# Altium PCB Solar_Phone_Charger.PcbDoc
Units mm, origin at the board's own origin, x right, y up, seen from the top; angles counter-clockwise.
Board outline 86 x 86 mm, 2 copper layers (Top Layer, Bottom Layer); 28 components, 11 nets, 64 pads, 3 vias.
Unrouted connection lines stored in the file: 1.
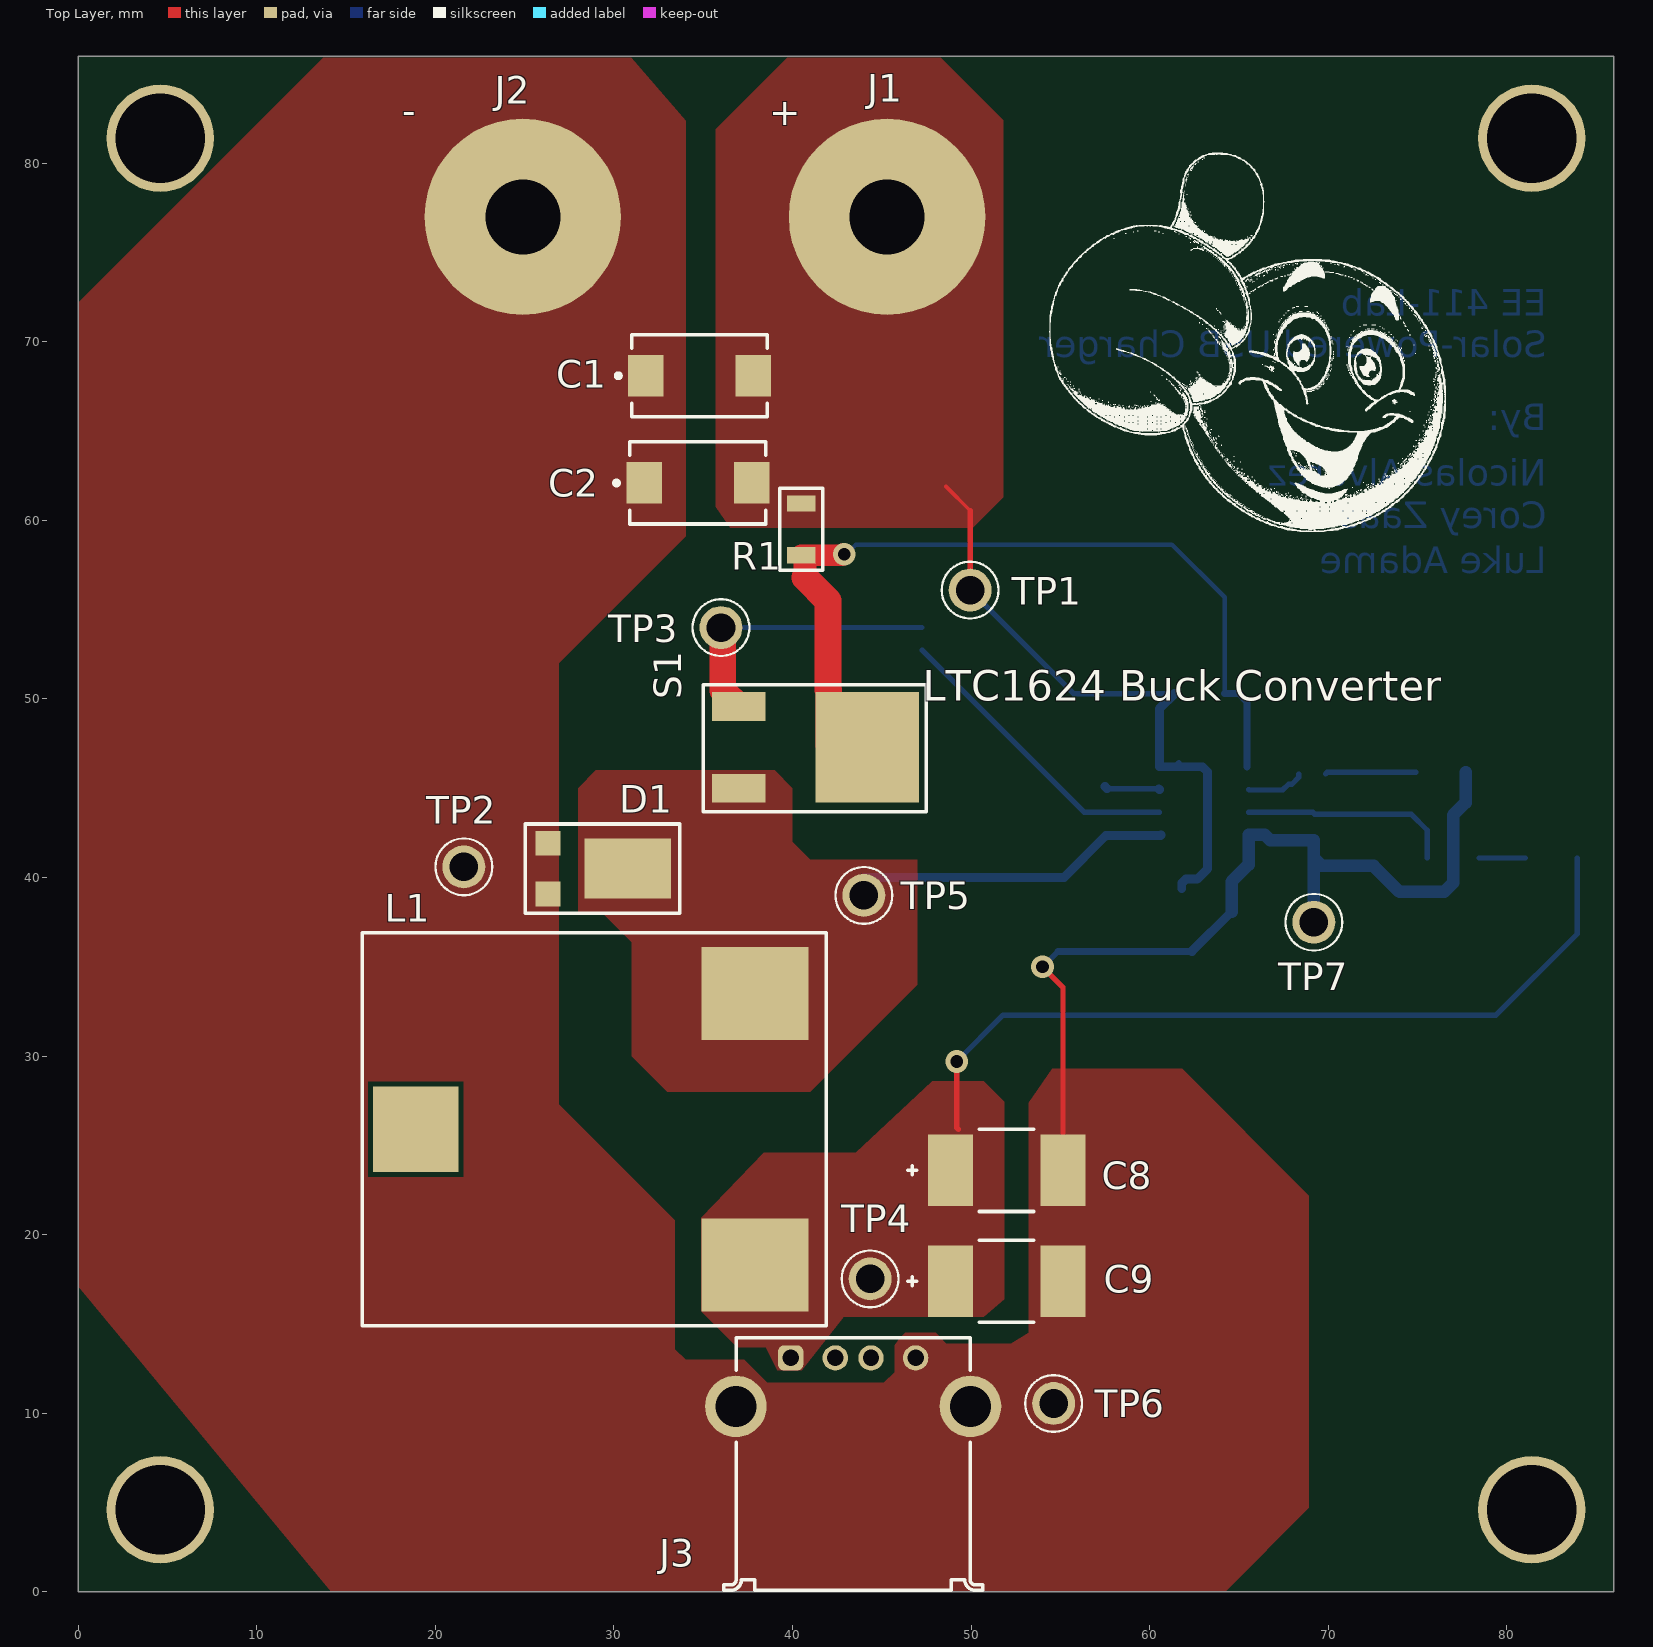
[diagram p0: Top Layer view]
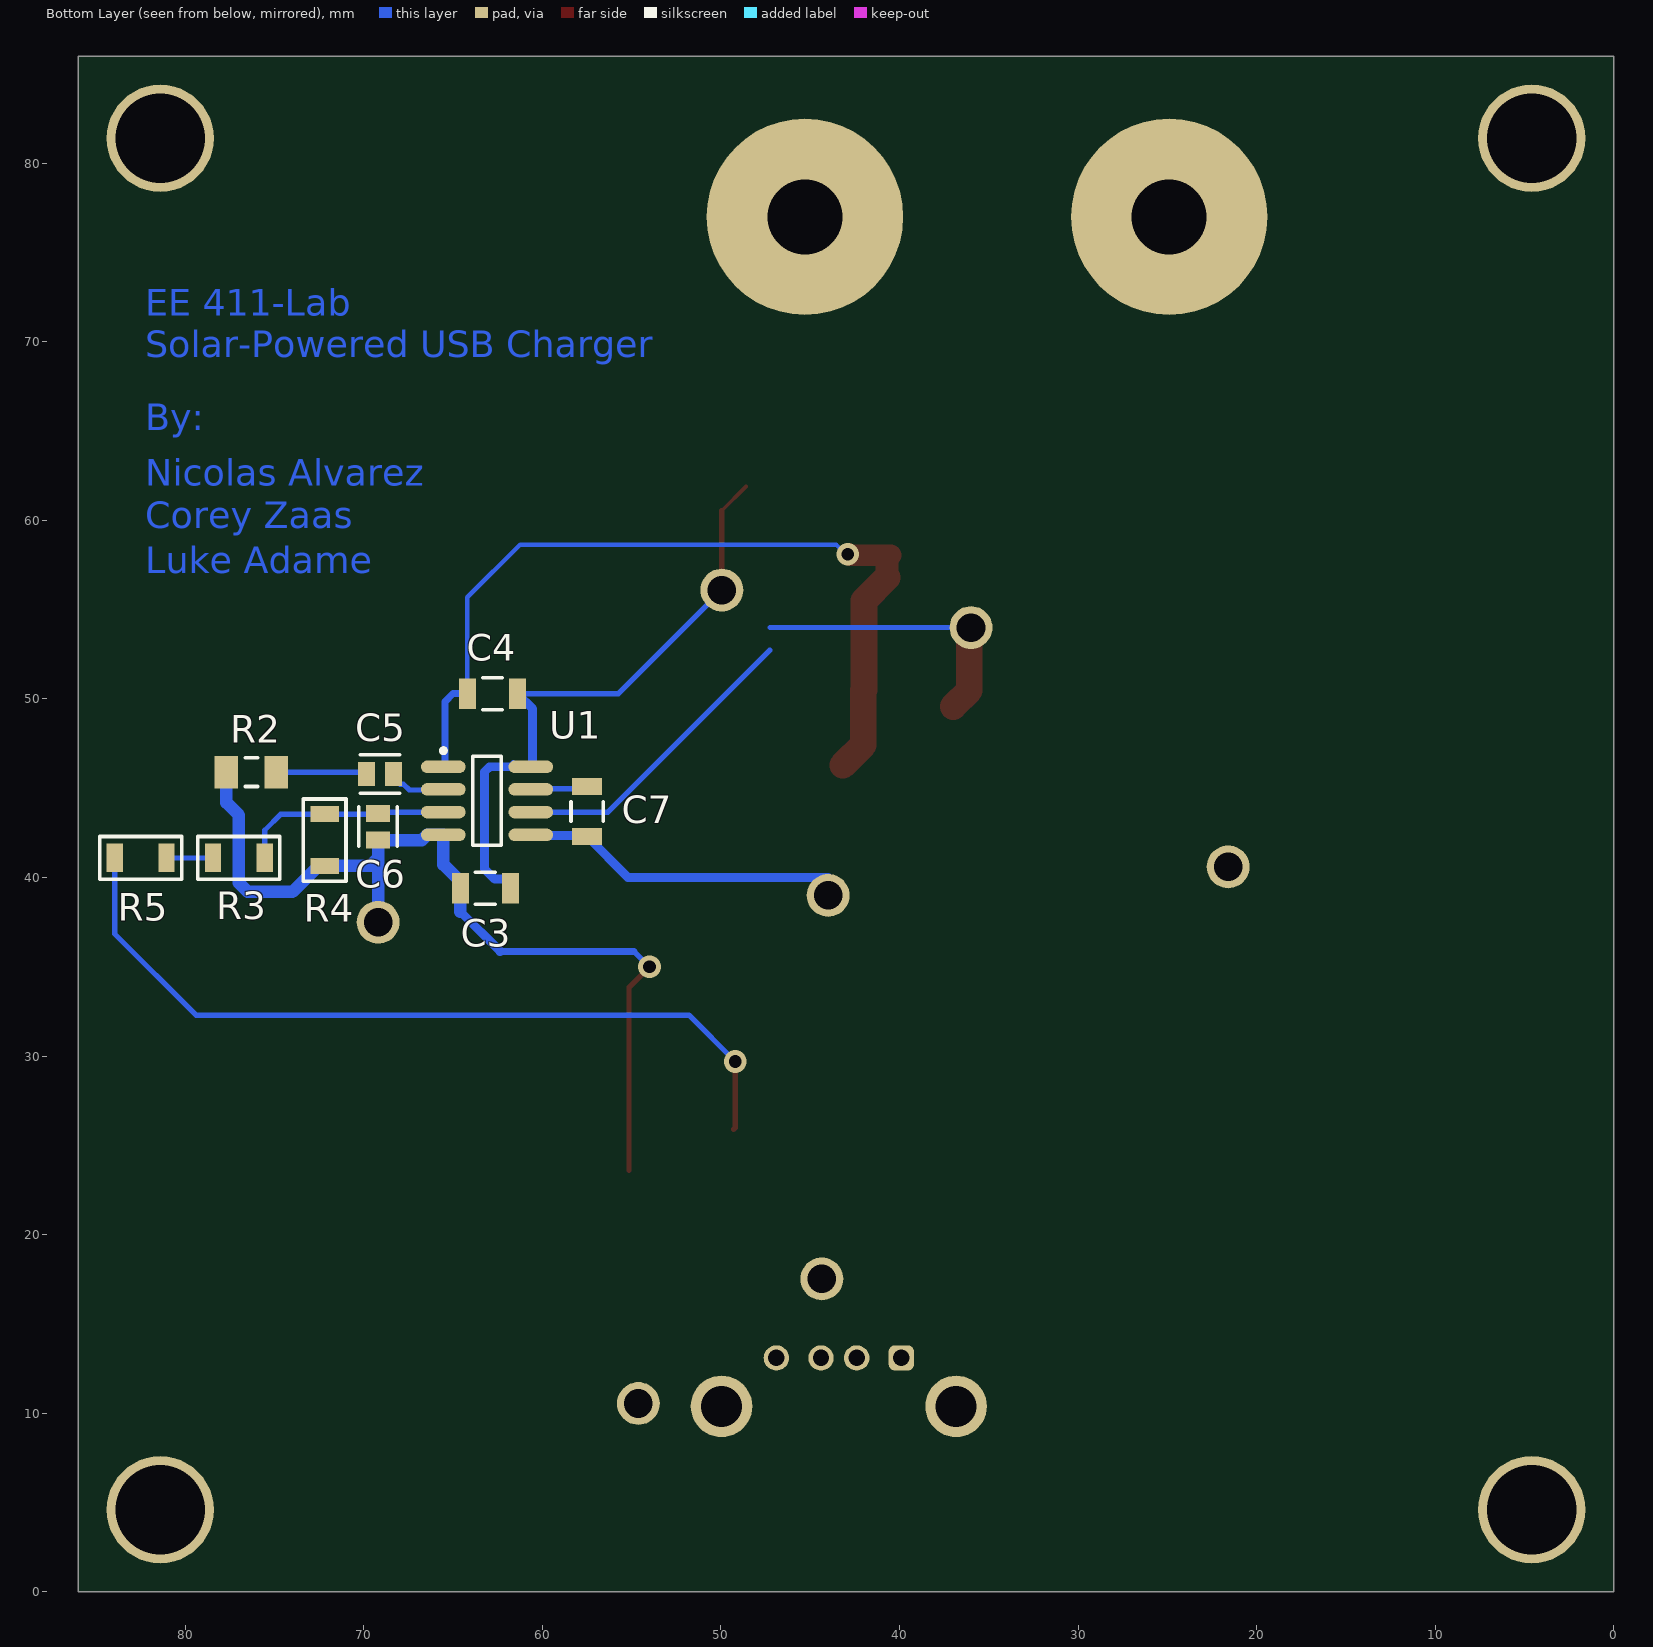
[diagram p1: Bottom Layer view, seen from below]
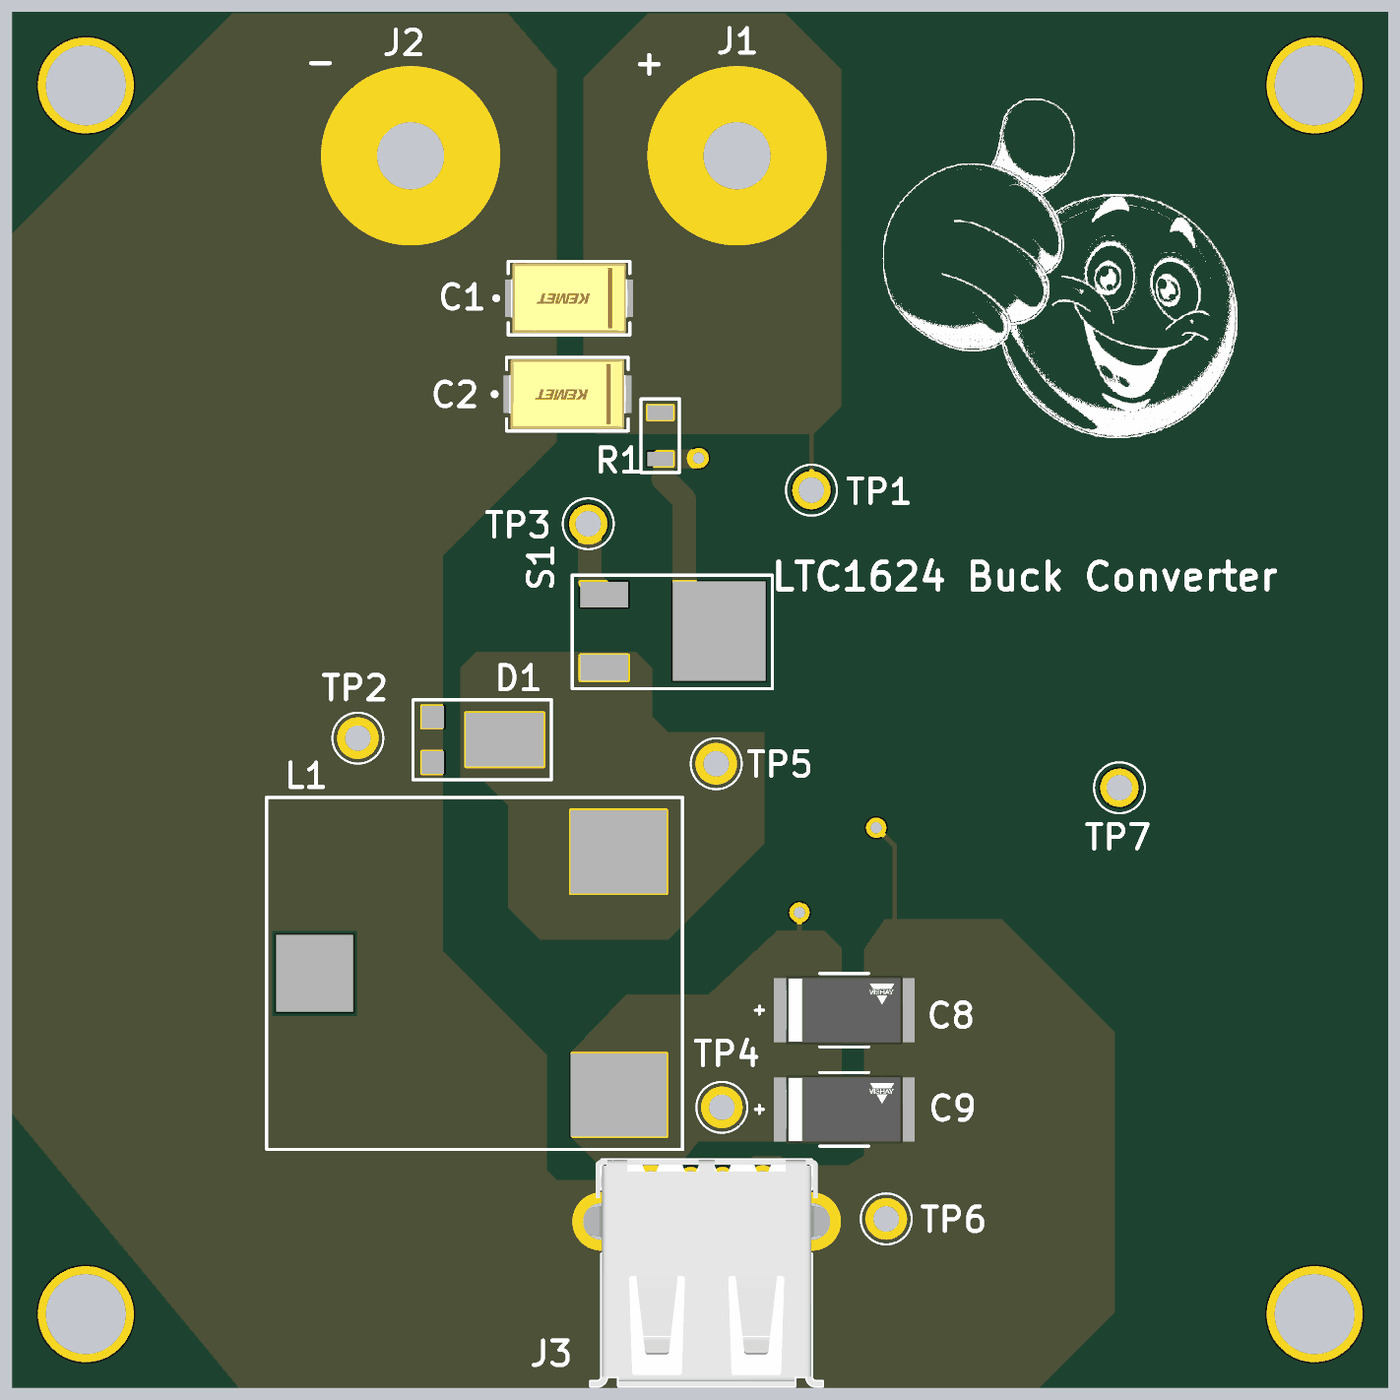
[diagram p2: 3D render of the assembled board from above, using the file's embedded part models]
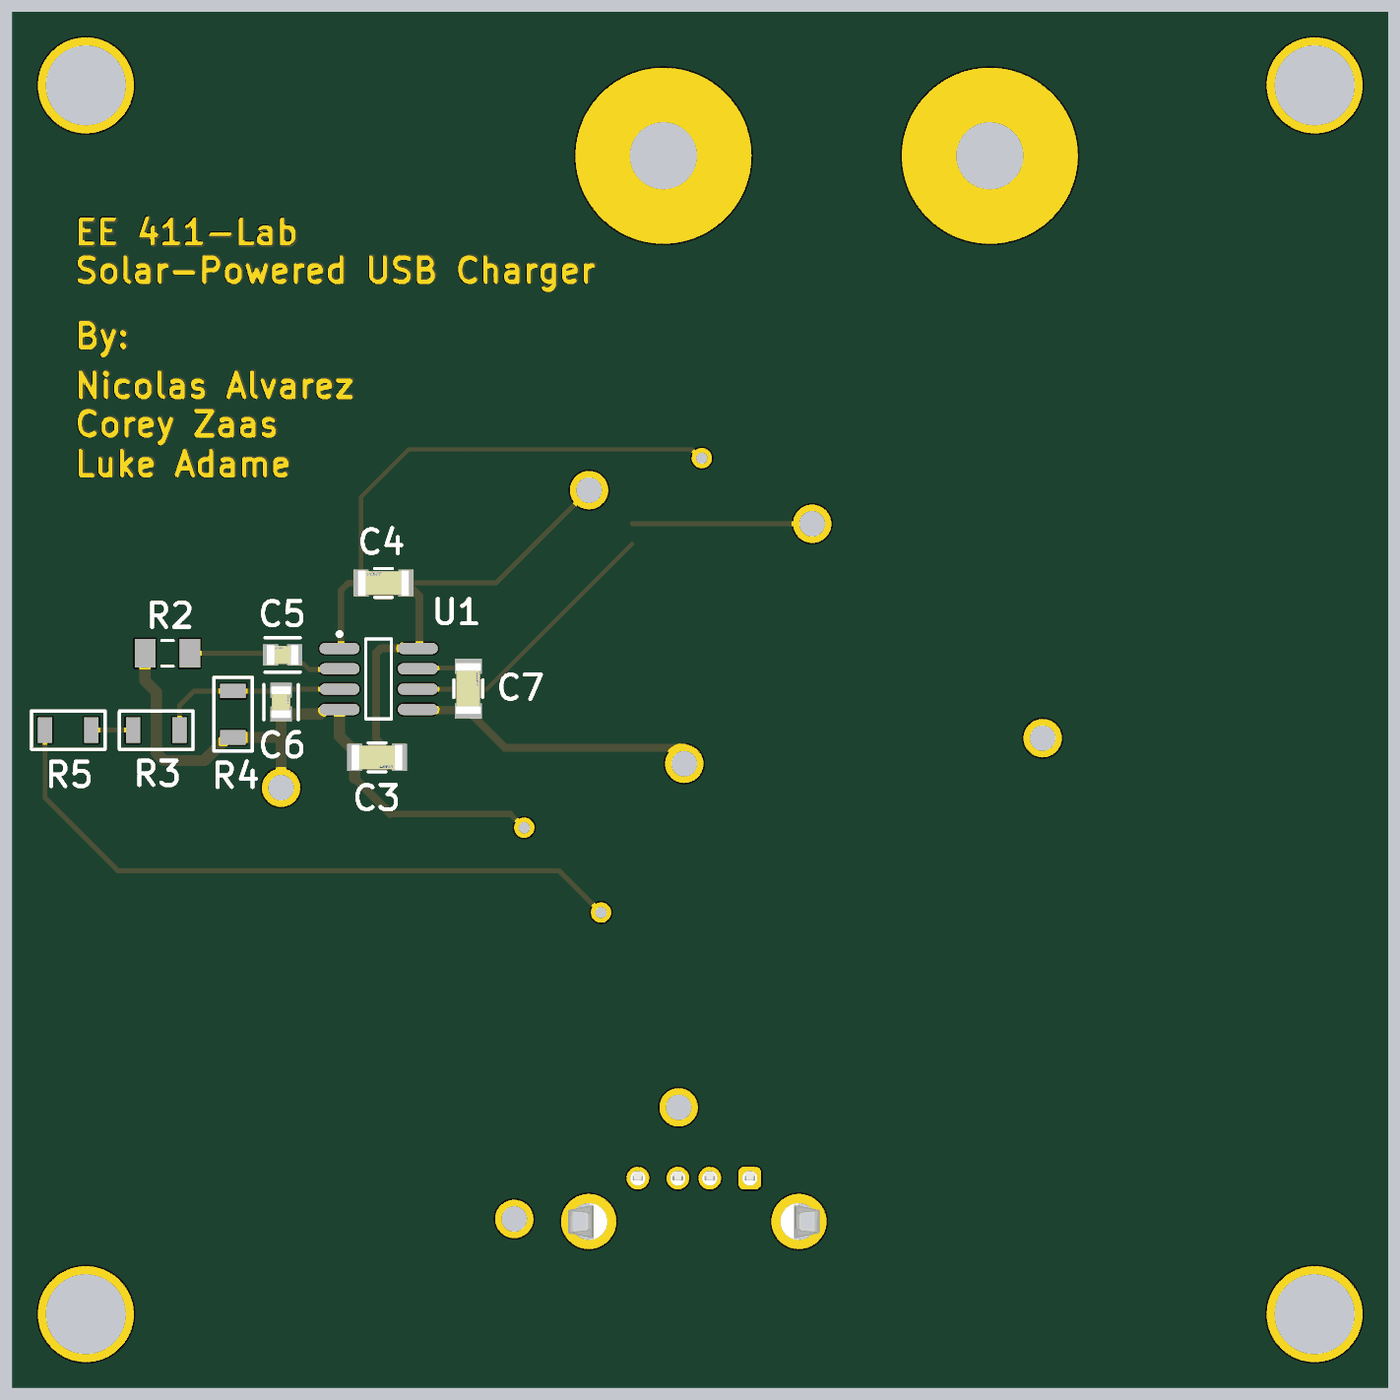
[diagram p3: 3D render of the assembled board from below, using the file's embedded part models]

## Layer stack, top to bottom
Top Solder: solder mask 0.0102, Solder Resist, Dk 3.5
Top Layer: signal copper 0.0356
Dielectric 1: dielectric 0.32, FR-4, Dk 4.8
Bottom Layer: signal copper 0.0356
Bottom Solder: solder mask 0.0102, Solder Resist, Dk 3.5

## Board outline
86,0 86,86 0,86 0,0

## Design rules (kind name [scope] priority, off if disabled: settings)
Clearance Clearance_10 [All] p1: gap=0.254 ignorepadtopadclearanceinfootprint=FALSE
Clearance Clearance_9 [All] p2: gap=0.254 ignorepadtopadclearanceinfootprint=FALSE
Clearance Clearance_8 [All] p3: gap=0.254 ignorepadtopadclearanceinfootprint=FALSE
Clearance Clearance_7 [All] p4: gap=0.254 ignorepadtopadclearanceinfootprint=FALSE
Clearance Clearance_6 [All] p5: gap=0.254 ignorepadtopadclearanceinfootprint=FALSE
Clearance Clearance_5 [All] p6: gap=0.254 ignorepadtopadclearanceinfootprint=FALSE
Clearance Clearance_4 [All] p7: gap=0.254 ignorepadtopadclearanceinfootprint=FALSE
Clearance Clearance_3 [All] p8: gap=0.254 ignorepadtopadclearanceinfootprint=FALSE
Clearance Clearance_2 [All] p9: gap=0.254 ignorepadtopadclearanceinfootprint=FALSE
Clearance Clearance_1 [All] p10: gap=0.254 ignorepadtopadclearanceinfootprint=FALSE
Clearance [All] p11: gap=0.254 ignorepadtopadclearanceinfootprint=FALSE
ComponentClearance ComponentClearance_1 [All] p1: gap=0.254 collisioncheckmode=3 verticalgap=0.254 showdistances=FALSE
ComponentClearance [All] p2: gap=0.254 collisioncheckmode=3 verticalgap=0.254 showdistances=FALSE
HoleSize HoleSize_1 [All] p1: absolutevalues=TRUE maxlimit=5.1 minlimit=0.025 maxpercent=80.000 minpercent=20.000
HoleSize [All] p2: absolutevalues=TRUE maxlimit=5.1 minlimit=0.025 maxpercent=80.000 minpercent=20.000
MinimumSolderMaskSliver MinimumSolderMaskSliver_1 [All] p1: minsoldermaskwidth=0.254
MinimumSolderMaskSliver [All] p2: minsoldermaskwidth=0.1
PolygonConnect [All] p1: connectstyle=Direct reliefconductorwidth=0.254 reliefentries=4 polygonreliefangle="90 Angle" airgapwidth=0.254
RoutingVias [All] p1: holewidth=0.711 width=1.27 viastyle="Through Hole" minholewidth=0.711 minwidth=1.27 maxholewidth=0.711 maxwidth=1.27
SilkToSolderMaskClearance [IsPad] p1: minsilkscreentomaskgap=0.1 clearancetoexposedcopper=TRUE
SolderMaskExpansion [All] p1: expansion=0.102 istentingtop=FALSE
Width [All] p1: maxlimit=2 minlimit=0.2 preferedwidth=0.2 minimp=50.000000 maximp=50.000000 favimp=50.000000
26 further rules are at their usual default settings.

## Components (designator, comment, footprint, x,y, rotation, side; value= is the part's Value field where it differs from the comment)
C1 "T495X336M035ATE100" FP-T495X336M035ATE100-MFG 34.8,68.1 r0 top
C2 "T495X336M035ATE100" FP-T495X336M035ATE100-MFG 34.7,62.1 r0 top
C3 "C1206C104J5RACTU" FP-C1206C-EB-MFG 63.2,39.4 r0 bottom value="0.10 μF"
C4 "C1206C102F1GACTU" FP-C1206C-EB-MFG 62.8,50.3 r180 bottom value="1,000 pF"
C5 "C0805C471J5GAC7210" FP-C0805C-DN-MFG 69.1,45.8 r180 bottom value="470 pF"
C6 "C0805C101K5GAC7210" FP-C0805C-DN-MFG 69.2,42.85 r270 bottom value="100 pF"
C7 "C1206C104J5RACTU" FP-C1206C-EB-MFG 57.5,43.7 r270 bottom value="0.10 μF"
C8 "100uF, 20V" FP-TR3D-MFG 52,23.6 r180 top
C9 "100uF, 20V" FP-TR3D-MFG 52,17.4 r180 top
D1 "45V, 10A" PowerDI5 26.3,40.5 r180 top
J1 "4MM Banana Female Socket" "4MM Banana Female Socket"#1 45.3,77.4 r0 top
J2 "4MM Banana Female Socket" "4MM Banana Female Socket"#2 24.9,77.3 r0 top
J3 "614004190021" 614004190021 43.4,7.165 r0 top
L1 "30uH, 10%" ERU24 37.9,25.9 r90 top
R1 "0.05R, 0.5 W" R1206 40.5,59.5 r270 top
R2 "ERA8AEB682V" RESC3216X70X50NL20T25 76.3,45.9 r180 bottom
R3 "35.7KR" R1206 77,41.1 r0 bottom
R4 "11KR" R1206 72.2,42.1 r90 bottom value=11kR
R5 "RES" R1206 82.5,41.1 r0 bottom
S1 "40 V, 11.8mOhm, 45 A" DPAKSWITCH 35.5,47.29 r270 top
TP1 "5287" KEYSTONE_5287 49.95,56.1 r0 top
TP2 "5287" KEYSTONE_5287 21.6,40.6 r0 top
TP3 "5287" KEYSTONE_5287 36,54 r0 top
TP4 "5287" KEYSTONE_5287 44.35,17.525 r0 top
TP5 "5287" KEYSTONE_5287 44,39 r0 top
TP6 "5287" KEYSTONE_5287 54.625,10.55 r0 top
TP7 "5287" KEYSTONE_5287 69.2,37.5 r0 top
U1 "Switching Controller" LTC1624 63.1,44.3 r180 bottom

## Footprints (in the part's own frame and the unit in brackets; to place one, negate y for a bottom-side part, rotate by r counter-clockwise, add the part's x,y. Pads: shape width x height; smd on the part's side, far side on the other; paste and mask are expansions set on the pad)
"4MM Banana Female Socket"#1 [mm]
  round 11 hole 4.2: 1(0,-0.4)
"4MM Banana Female Socket"#2 [mm]
  round 11 hole 4.2: 1(0,-0.3)
614004190021 [mm] "USB 2.0 Type A Horizontal THT"
  rrect50% 1.42x1.42 hole 0.92: 1(-3.5,5.935)
  round 1.42 hole 0.92: 2(-1,5.935) 3(1,5.935) 4(3.5,5.935)
  round 3.45 hole 2.3: Shell(-6.57,3.225) Shell(6.57,3.225)
  silkscreen extent -7.25,-7.08 7.25,7.07, body extent -7.85,-7.07 7.85,7.08, height 7.8
DPAKSWITCH [mm]
  rect 1.6x3 smd: 1(-2.29,1.5) 3(2.29,1.5)
  rect 6.2x5.8 smd: 2(0,8.68)
  silkscreen extent -3.5,-0.5 3.6,12
ERU24 [mm]
  rect 5.2x6 smd: 1(7.6,0) 2(-7.6,0)
  rect 4.8x4.8 smd: 3(0,19)
  silkscreen extent -11,-4 11,22
FP-C0805C-DN-MFG [mm]
  rect 0.95x1.35 smd paste+0 mask+0: 1(-0.75,0) 2(0.75,0)
  silkscreen extent -1.1,-1.07 1.1,1.07, body extent -1,-0.63 1,0.63, height 0.88
FP-C1206C-EB-MFG [mm]
  rect 0.95x1.7 smd paste+0 mask+0: 1(-1.4,0) 2(1.4,0)
  silkscreen extent -0.55,-0.9 0.55,0.9, body extent -1.6,-0.8 1.6,0.8, height 0.88
FP-T495X336M035ATE100-MFG [mm]
  rect 1.99x2.33 smd paste+0 mask+0: 1(-3.01,0) 2(3.01,0)
  silkscreen extent -4.67,-2.3 3.8,2.3, body extent -4.13,-2.42 4.13,2.42, height 0.25
FP-TR3D-MFG [mm]
  rect 2.5x4 smd paste+0 mask+0: 1(-3.15,0) 2(3.15,0)
  silkscreen extent -1.53,-2.3 5.55,2.3, body extent -4.5,-2.4 4.5,2.4, height 0.25
KEYSTONE_5287 [mm]
  round 2.4 hole 1.6: 1(0,0)
  silkscreen extent -1.59,-1.59 1.59,1.59
LTC1624 [mm]
  oval 2.5x0.7 smd: 1(-2.45,1.905) 2(-2.45,0.635) 3(-2.45,-0.635) 4(-2.45,-1.905) 5(2.45,-1.905) 6(2.45,-0.635) 7(2.45,0.635) 8(2.45,1.905)
  silkscreen extent -2.58,-2.5 0.8,2.93, body extent -2,-2.5 2,2.5, height 1.76
PowerDI5 [mm]
  rect 1.4x1.39 smd: 1(0,1.42) 2(0,-1.42)
  rect 4.86x3.36 smd: 3(-4.482,0)
  silkscreen extent -7.4,-2.5 1.25,2.5
R1206 [mm]
  rect 0.9x1.6 smd: 1(-1.45,0) 2(1.45,0)
  silkscreen extent -2.3,-1.2 2.3,1.2
RESC3216X70X50NL20T25 [mm] "Chip Resistor, 2-Leads, Body 3.20x1.60mm, IPC Medium Density"
  rect 1.3x1.8 smd: 1(-1.4,0) 2(1.4,0)
  silkscreen extent -0.35,-0.8 0.35,0.8, body extent -1.7,-0.9 1.7,0.9, height 0.7

## Part data
C1 C2: library part CMP-03017-000065-1, "CAP TANT 33UF 20% 35V 2917", Capacitance=33uF, Case Code (Imperial)=2917, Case Code (Metric)=7343, Case/Package=Molded, ESR (Equivalent Series Resistance)=100mR, Max Operating Temperature=125°C, Min Operating Temperature=-55°C, Tolerance=20%, Voltage Rating=35V, Construction=Flat, Depth=4.3mm, Dissipation Factor=6%, Height=4.3mm, Length=7.3mm, Packaging="Tape and Reel", Polarity=Polar, Radiation Hardening=No, RoHS Compliant=Yes, Series=T495, Termination=SMD/SMT, Voltage Rating (DC)=35V, Weight=0.023634oz, Width=4.3mm
C3 C7: library part CMP-03020-003996-1, "Multilayer Ceramic Capacitor, C Series, 0.1 - F, - 5%, X7r, 50 V, 1206 [3216 Metric] Rohs Compliant: Yes", Capacitance="0.10 μF", Manufacturer=KEMET, Package=C1206C-EB, Temperature="-55°C to +150°C", Temperature Characteristic=X7R, Temperature Coefficient=15%, Temperature Range High=+150°C, Temperature Range Low=-55°C, Tolerance=0.05, Voltage Rating="50 V", Automotive=Yes, Automotive Grade="Grade 0", Category=Cap, ComponentLink2Description=Datasheet, ComponentLink2URL=https://content.kemet.com/datasheets/KEM_C1007_X8R_ULTRA_150C_SMD.pdf, Device Class L1="Passive Components", Device Class L2=Capacitors, Device Class L3="Ceramic Capacitors", Digikey Description="Multilayer Ceramic Capacitor, C Series, 0.1 - F, - 5%, X7r, 50 V, 1206 [3216 Metric] Rohs Compliant: Yes", Height=0.88mm, Ipc Land Pattern Name=CAPC320160X78, Lead Free=Yes, Manufacturer Part Number=C1206C104J5RACTU, Material=Ceramic, Mouser Description="Cap Ceramic 0.1uF 50V X7R 5% SMD 1206 125°C Plastic T/R", Octopart=https://octopart.com/c1206c104j5ractu-kemet-110335, RoHS=TRUE
C4: library part CMP-03020-013132-1, "CAP CER 1000PF 100V 1% NP0 1206", Capacitance="1,000 pF", Manufacturer=KEMET, Package=C1206C-EB, Temperature="-55°C to +150°C", Temperature Characteristic=C0G, Temperature Coefficient=15%, Temperature Range High=+150°C, Temperature Range Low=-55°C, Tolerance=0.01, Voltage Rating="100 V", Automotive=Yes, Automotive Grade="Grade 0", Category=Cap, ComponentLink2Description=Datasheet, ComponentLink2URL=https://content.kemet.com/datasheets/KEM_C1007_X8R_ULTRA_150C_SMD.pdf, Device Class L1="Passive Components", Device Class L2=Capacitors, Device Class L3="Ceramic Capacitors", Digikey Description="CAP CER 1000PF 100V 1% NP0 1206", Height=0.88mm, Ipc Land Pattern Name=CAPC320160X78, Lead Free=Yes, Manufacturer Part Number=C1206C102F1GACTU, Material=Ceramic, Mouser Description="Multilayer Ceramic Capacitors MLCC - SMD/SMT 100volts 1000pF C0G 1%", Octopart=https://octopart.com/c1206c102f1gactu-kemet-17062505, RoHS=TRUE
C5: library part CMP-03020-030339-1, "C0805 470 pF C0G 30ppm/°C 5.00% 50 V", Capacitance="470 pF", Manufacturer=KEMET, Package=C0805C-DN, Temperature="-55°C to +125°C", Temperature Characteristic=C0G, Temperature Coefficient=30ppm/°C, Temperature Range High=+125°C, Temperature Range Low=-55°C, Tolerance=0.05, Voltage Rating="50 V", Automotive=No, Category=Cap, ComponentLink2Description=Datasheet, ComponentLink2URL=https://content.kemet.com/datasheets/KEM_C1003_C0G_SMD.pdf, Device Class L1="Passive Components", Device Class L2=Capacitors, Device Class L3="Ceramic Capacitors", Height=0.88mm, Ipc Land Pattern Name=CAPC200125X78, Lead Free=Yes, Manufacturer Part Number=C0805C471J5GAC7210, Material=Ceramic, Mouser Description="Multilayer Ceramic Capacitors MLCC - SMD/SMT 50volts 470pF C0G 5%", Octopart=https://octopart.com/c0805c471j5gac7210-kemet-3901141, RoHS=TRUE
C6: library part CMP-03020-002806-2, "C0805 100 pF C0G 30ppm/°C 10.00% 50 V", Capacitance="100 pF", Manufacturer=KEMET, Package=C0805C-DN, Temperature="-55°C to +125°C", Temperature Characteristic=C0G, Temperature Coefficient=30ppm/°C, Temperature Range High=+125°C, Temperature Range Low=-55°C, Tolerance=0.1, Voltage Rating="50 V", Automotive=No, Category=Cap, ComponentLink2Description=Datasheet, ComponentLink2URL=https://content.kemet.com/datasheets/KEM_C1003_C0G_SMD.pdf, Device Class L1="Passive Components", Device Class L2=Capacitors, Device Class L3="Ceramic Capacitors", Height=0.88mm, Ipc Land Pattern Name=CAPC200125X78, Lead Free=Yes, Manufacturer Part Number=C0805C101K5GAC7210, Material=Ceramic, Octopart=https://octopart.com/c0805c101k5gac7210-kemet-11759675, RoHS=TRUE
C8 C9: library part CMP-00030-44433242-1, "TR3D107K020C0080 Surface Mount Tantalum Capacitor, 100 uF, 20 V, ± 10%, -55 °C, 125 °C, 2917 [7343-31 Metric]", Capacitance=100µF, Case Code (Imperial)=2917, Case Code (Metric)=7343, ESR (Equivalent Series Resistance)=80mΩ, Leakage Current=20µA, Max Operating Temperature=125°C, Min Operating Temperature=-55°C, Ripple Current=1.37A, Tolerance=10%, Voltage Rating=20V, Case/Package=2917, Depth=4.3mm, Dissipation Factor=8%, Features="General Purpose", Height=3.1mm, Height - Seated (Max)=3.0988mm, Lead Free="Lead Free", Length=7.3mm, Mount="Surface Mount", NexarPartId=44433242, Packaging="Tape and Reel", Polarity=Polar, Radiation Hardening=No, REACH SVHC=Unknown, RoHS=Compliant, Schedule B="8532210050, 8532210050", Termination=SMD/SMT, Voltage Rating (DC)=20V, Width=4.3mm
D1: library part SDT10A45P5-13D, "Diode Schottky 45V 10A 5-Pin PowerDI T/R", Manufacturer=Diodes, Supplier Part Number=31-SDT10A45P5-13DCT-ND, ComponentLink1Description=https://datasheet.ciiva.com:443/pdfs/VipMasterIC/IC/DIOD/DIOD-S-A0008345900/DIOD-S-A0008345900-1.pdf?src-supplier=IHS+Markit, ComponentLink1URL=https://datasheet.ciiva.com:443/pdfs/VipMasterIC/IC/DIOD/DIOD-S-A0008345900/DIOD-S-A0008345900-1.pdf?src-supplier=IHS+Markit, Manufacturer Part Number=SDT10A45P5-13D, Pricing="1=0.51, 10=0.394, 100=0.2362, 500=0.21866, 1000=0.14869, 2000=0.13689 (USD)", Reach SVHC Compliant=No, RoHS=Yes, Stock=4970, Supplier=Digikey
J3: library part CMP-1502-03228-2, Contact Resistance=30mΩ, Current Rating=3A, Housing Color=White, Insulation Resistance=1GΩ, Max Operating Temperature=85°C, Min Operating Temperature=-40°C, Operating Supply Voltage=30V, Connector Type=USB, Contact Material=Brass, Contact Plating=Gold, Gender=Receptacle, Insulation Material=PBT, Mount="Horizontal, Through Hole", NexarPartId=71472441, Number of Contacts=4, Number of Pins=4, Orientation=Horizontal, REACH SVHC="No SVHC", RoHS=Compliant, USB Standard="USB 2.0"
L1: library part B82559A0303A024, "General Purpose Inductor, 30uH, 10%, 1 Element, Ferrite-Core, SMD, 9790", Manufacturer=TDK, Supplier Part Number 1=495-B82559A0303A024CT-ND, Category="Fixed Inductors", Manufacturer Part Number=B82559A0303A024, Pricing 1="1=8.34, 10=7.194, 25=6.6724 (USD)", RoHS=Yes, Stock 1=910, Supplier 1=Digikey
R1: library part KDV12DR050ET, "Fixed Resistor, Metal Film, 0.5W, 0.05ohm, 0.5% +/-Tol, 100ppm/Cel, Surface Mount, 1206", Manufacturer=Ohmite, Supplier Part Number=273-KDV12DR050ETCT-ND, Category="Chip SMD Resistors", Manufacturer Part Number=KDV12DR050ET, Pricing="1=0.46, 10=0.312, 25=0.2428, 50=0.179, 100=0.1245, 250=0.10856, 500=0.0895, 1000=0.06475 (USD)", RoHS=No, RoHS Compliant=Yes, Stock=2206, Supplier=Digikey
R2: library part CMP-2003-04491-1, Manufacturer=Panasonic, Part Number=ERA8AEB682V
R3: library part ERA-8ARW3572V, "1206 Thin Film Chip Resistor / 1206 SMD Resistor 0.05% 10PPM 35.7 Kohm", Manufacturer=Panasonic, Supplier Part Number=P18836CT-ND, Category="Chip SMD Resistors", ComponentLink1Description=https://industrial.panasonic.com/cdbs/www-data/pdf/RDM0000/AOA0000C307.pdf?src-supplier=Digikey, ComponentLink1URL=https://industrial.panasonic.com/cdbs/www-data/pdf/RDM0000/AOA0000C307.pdf?src-supplier=Digikey, Manufacturer Part Number=ERA-8ARW3572V, Pricing="1=1.53, 10=1.056, 50=0.7948, 100=0.6991, 500=0.54712 (USD)", RoHS=Yes, Stock=958, Supplier=Digikey
R4: library part ERA-8ARW113V, "Fixed Resistor, Thin Film, 0.25W, 11000ohm, 150V, 0.05% +/-Tol, 10ppm/Cel, Surface Mount, 1206", Case/Package=1206, Manufacturer=Panasonic, Max Operating Temperature=155°C, Min Operating Temperature=-55°C, Package Height=0.6mm, Package Length=3.2mm, Package Style=SMTMeter, Package Width=1.6mm, Power=250mW, Rated Temperature=85°C, Resistor Type="FIXED RESISTOR", Supplier Part Number=P11KCTCT-ND, Temperature Coefficient=10ppm/°C, Tolerance=0.05%, Working Voltage=150V, Category="Chip SMD Resistors", ComponentLink1Description=https://datasheet.ciiva.com:443/pdfs/VipMasterIC/IC/PANA/PANA-S-A0009459258/PANA-S-A0009459258-1.pdf?src-supplier=IHS+Markit, ComponentLink1URL=https://datasheet.ciiva.com:443/pdfs/VipMasterIC/IC/PANA/PANA-S-A0009459258/PANA-S-A0009459258-1.pdf?src-supplier=IHS+Markit, ComponentLink2Description=https://media.digikey.com/pdf/Data%20Sheets/Panasonic%20Resistors%20Thermistors%20PDFs/ERA_Series_LE.pdf?src-supplier=Digikey, ComponentLink2URL=https://media.digikey.com/pdf/Data%20Sheets/Panasonic%20Resistors%20Thermistors%20PDFs/ERA_Series_LE.pdf?src-supplier=Digikey, ComponentLink3Description=http://www.farnell.com/datasheets/1937238.pdf?src-supplier=Farnell, ComponentLink3URL=http://www.farnell.com/datasheets/1937238.pdf?src-supplier=Farnell, ComponentLink4Description=http://www.farnell.com/datasheets/1937238.pdf?src-supplier=Element14, ComponentLink4URL=http://www.farnell.com/datasheets/1937238.pdf?src-supplier=Element14, Construction=Rectangular, JESD-609 Code=e3, Manufacturer Part Number=ERA-8ARW113V, Mounting Technology="Surface Mount", Packaging="Tape and Reel", Pins=2, Pricing="1=1.53, 10=1.056, 50=0.7948, 100=0.6991, 500=0.54712 (USD)", Reach SVHC Compliant=Yes, Reference Standard=AEC-Q200, RoHS=Yes, RoHS Compliant=Yes, Stock=4456, Supplier=Digikey, Technology="THIN FILM", Terminal Finish=Nickel, Termination=Wraparound
R5: "Generic 1206 Resistor", Manufacturer=Panasonic, Manufacturer Part Number=ERA-8ARW3572V, Supplier Part Number=P18836CT-ND, Category="Chip SMD Resistors", ComponentLink1Description=https://industrial.panasonic.com/cdbs/www-data/pdf/RDM0000/AOA0000C307.pdf?src-supplier=Digikey, ComponentLink1URL=https://industrial.panasonic.com/cdbs/www-data/pdf/RDM0000/AOA0000C307.pdf?src-supplier=Digikey, Pricing="1=1.53, 10=1.056, 50=0.7948, 100=0.6991, 500=0.54712 (USD)", RoHS=Yes, Stock=958, Supplier=Digikey
S1: library part NVD5C478NLT4G, "Single N-Channel Power MOSFET, 40V, 45A, 7.7mΩ DPAK 2500 tape and reel", Manufacturer="ON Semiconductor", Supplier Part Number 1=NVD5C478NLT4GOSCT-ND, Category=MOSFETs, ComponentLink1Description=https://datasheet.ciiva.com:443/pdfs/VipMasterIC/IC/ONSM/ONSM-S-A0004900107/ONSM-S-A0004903403-1.pdf?src-supplier=IHS+Markit, ComponentLink1URL=https://datasheet.ciiva.com:443/pdfs/VipMasterIC/IC/ONSM/ONSM-S-A0004900107/ONSM-S-A0004903403-1.pdf?src-supplier=IHS+Markit, ComponentLink2Description=http://www.onsemi.com/pub/Collateral/NVD5C478NL-D.PDF?src-supplier=Digikey, ComponentLink2URL=http://www.onsemi.com/pub/Collateral/NVD5C478NL-D.PDF?src-supplier=Digikey, Manufacturer Part Number=NVD5C478NLT4G, Pricing 1="1=1.65, 10=1.368, 100=1.0891, 500=0.92158, 1000=0.78194 (USD)", Reach SVHC Compliant=No, RoHS=Yes, Stock 1=6434, Supplier 1=Digikey
TP1 TP2 TP3 TP4 TP5 TP6 TP7: "Blue Test Point", Package=None, Availability=Unavailable, MP=5287, Price=None
U1: library part LTC1624IS8#TRPBF, "Switching Controller, Current-mode, 2A, 225kHz Switching Freq-Max, CMOS, PDSO8", Case/Package=SOP, Frequency=225kHz, Manufacturer="Analog Devices / Linear Technology", Max Operating Temperature=85°C, Max Output current=2A, Max Supply Voltage=36V, Min Input Voltage=3.5V, Min Operating Temperature=-40°C, Nominal Supply Voltage=15V, Package Body Material=Plastic, Package Shape=Rectangular, Package Style="SMALL OUTLINEMeter", Peak Reflow Temperature (Cel)=260°C, Supplier Part Number 1=505-LTC1624IS8#TRPBFCT-ND, Temperature Grade=INDUSTRIAL, Time @ Peak Reflow Temperature-Max (s)=30s, Category="Voltage Regulators - Switching", Channels=1, ComponentLink1Description=https://datasheet.ciiva.com:443/pdfs/VipMasterIC/IC/LITC/LITCS09260/LITCS09260-1.pdf?src-supplier=IHS+Markit, ComponentLink1URL=https://datasheet.ciiva.com:443/pdfs/VipMasterIC/IC/LITC/LITCS09260/LITCS09260-1.pdf?src-supplier=IHS+Markit, ComponentLink2Description=https://datasheet.ciiva.com/15110/getdatasheetpartid-44556-15110797.pdf?src-supplier=Verical, ComponentLink2URL=https://datasheet.ciiva.com/15110/getdatasheetpartid-44556-15110797.pdf?src-supplier=Verical, Control Mode=CURRENT-MODE, Control Technique="PULSE WIDTH MODULATION", Height - Seated (Max)=1.752mm, JESD-30 Code=R-PDSO-G8, JESD-609 Code=e3, Length=4.9025mm, Manufacturer Part Number=LTC1624IS8#TRPBF, Moisture Sensitivity Level=1, Pins=8, Pricing 1="1=11.26, 10=10.351, 25=9.9216, 100=8.7419, 250=8.3128, 500=7.7765, 1000=7.13292 (USD)", Qualification Status="Not Qualified", Reach SVHC Compliant=Yes, RoHS=Yes, RoHS Compliant=Yes, Stock 1=2084, Supplier 1=Digikey, Surface Mount=Yes, Switcher Configuration=SINGLE, Technology=CMOS, Terminal Finish=Tin, Terminal Form="Gull Wing", Terminal Pitch=1.27mm, Terminal Position=DUAL, Throw Configuration="SWITCHING CONTROLLER", Width=3.899mm

## Free pads (board coordinates)
  round 6 hole 5 unplated: MH1(4.6,81.4) MH2(81.4,81.4) MH3(4.6,4.6) MH4(81.4,4.6)

## Via types
v1: diameter 1.27, hole 0.711, Top Layer to Bottom Layer, 3 vias

## Nets (pads, with @x,y where several pads share a name; then routed paths per layer and width w, separated by ;. In a path a pad name is that pad's centre, name@x,y a point inside that pad or via, vN(x,y) a via of type N, cw(c..) or ccw(c..) an arc to the next point about the centre after c; other vN are vias at no path point)
BOOST: C7.1 U1.7 | length 3.1
  Bottom Layer w0.3: C7.1@57.627,44.973 U1.7@60.512,44.973
  Bottom Layer w0.5: C7.1 C7.1@57.627,44.973 ; U1.7@60.512,44.973 U1.7@60.55,44.935
GND: C1.1 C2.1 C3.2 C6.2 C8.1 C9.1 D1.1 D1.2 J2.1 J3.4 J3.Shell R2.1 R4.1 TP2.1 TP6.1 TP7.1 U1.4 | length 52.8
  Top Layer w0.3: v1(54,35) 55.15,33.85 C8.1
  Bottom Layer w0.3: v1(54,35) 54.865,35.865
  Bottom Layer w0.4: 54.865,35.865 62.365,35.865
  Bottom Layer w0.5: 62.365,35.865 64.6,38.1
  Bottom Layer w0.7: 64.6,38.1 C3.2 64.6,39.775 65.55,40.725 65.55,42.1 U1.4 66.45,42.395 66.745,42.1 C6.2 69.2,41.1 ; TP7.1@69.1,36.825 69.2,36.925 69.2,41.1 ; R2.1 77.7,44.2 77,43.5 77,39.7 76.5,39.2 74,39.2 72.55,40.65 69.65,40.65 69.2,41.1
I_TH/RUN: C5.2 U1.2 | length 3.3
  Bottom Layer w0.3: U1.2 65.585,44.9 67.45,44.9 67.775,45.225 67.975,45.225 68.35,45.6 C5.2
NetC5_1: C5.1 R2.2 | length 5.1
  Bottom Layer w0.3: C5.1 69.95,45.9 R2.2
NetR3_2: R3.2 R5.1 | length 2.6
  Bottom Layer w0.3: R3.2 R5.1
SENSE-: C4.1 R1.2 S1.2 U1.1 | length 48.2
  Top Layer w1.2: R1.2 42.75,58.05 v1@42.8,58.1
  Top Layer w1.3: 40.7,56.8 R1.2@40.7,57.9
  Top Layer w1.5: 40.7,56.8 42,55.5 42,50.519 42.03,50.489 42.03,47.44 S1.2@43.18,46.29
  Bottom Layer w0.254: v1(42.9,58.1) 43.007,58.1 43.557,58.65 61.25,58.65 64.2,55.7 C4.1
  Bottom Layer w0.4: C4.1 65,50.3 65.45,49.85 U1.1@65.45,46.205
SW: C7.2 D1.3 L1.1 S1.3 TP5.1 U1.5 | length 17.6
  Bottom Layer w0.5: TP5.1@44,40 55.2,40 C7.2 57.557,42.357 60.612,42.357 U1.5
TG: S1.1 TP3.1 U1.6 | length 33
  Top Layer w1.5: TP3.1@36.095,53.905 36.095,50.485 S1.1
  Bottom Layer w0.3: TP3.1 47.25,54 ; 47.275,52.725 56.335,43.665 U1.6@60.55,43.665
V_FB: C6.1 R3.1 R4.2 U1.3 | length 12
  Bottom Layer w0.3: U1.3 69.135,43.665 C6.1 69.25,43.55 R4.2 74.65,43.55 75.55,42.65 R3.1
VIN: C1.2 C2.2 C3.1 C4.2 J1.1 R1.1 TP1.1 U1.8 | length 36.4
  Top Layer w0.2: 48.6,61.9 49.95,60.55
  Top Layer w0.254: J1.1@50.2,75.96 J1.1@50.2,77.2
  Top Layer w0.3: TP1.1 49.95,60.55
  Bottom Layer w0.3: TP1.1 55.75,50.3 C4.2 ; U1.8@61.415,46.205 U1.8@61.646,46.436
  Bottom Layer w0.5: U1.8@60.55,46.205 60.55,49.45 C4.2 ; U1.8 61.415,46.205 61.646,46.205 62.961,46.205 63.254,45.912 63.254,40.504 62.668,39.918 62.025,39.918 61.8,39.693 C3.1
VOUT: C8.2 C9.2 J3.1 L1.2 R5.2 TP4.1 | length 45.8
  Top Layer w0.3: v1(49.2,29.7) 49.2,26 49.3,25.9
  Bottom Layer w0.3: v1(49.2,29.7) 51.8,32.3 79.4,32.3 83.95,36.85 R5.2
pads on no net: J3.2 J3.3 L1.3

## Polygon pours and split planes (outlines as drawn)
SW on Top Layer "SW_L01_P008" (solid, pour order 8): 39,46 40,45 40,42 41,41 47,41 47,34 41,28 33,28 31,30 31,36.375 29.375,38 28,38 28,45 29,46
VOUT on Top Layer "VOUT_L01_P004" (solid, pour order 4): 34.884,20.941 34.884,15.716 36.9,13.7 38.5,13.7 39.15,12.4 40.513,12.4 42.887,15.4 50.7,15.4 51.85,16.4 51.85,27.45 50.7,28.6 47.835,28.6 43.535,24.6 38.4,24.6
GND on Top Layer "Top Layer-GND" (solid, pour order 7): 0,17.115 14.164,0 64.225,0 68.925,4.7 68.925,22.197 61.822,29.3 54.537,29.3 53.222,27.4 53.222,14.5 52.222,13.9 48.622,13.9 48.022,14.5 46.322,14.5 46.022,14.2 45.722,13.8 45.722,12.3 45.122,11.7 38.6,11.7 37.3,13 34.022,13 33.422,13.6 33.422,20.8 26.922,27.3 26.922,52 34.022,59.1 34.022,82.381 30.978,85.9 13.725,85.9 0,72.175
VIN on Top Layer "VIN_L01_P001" (solid, pour order 1): 35.7,60.771 36.52,59.6 50.1,59.6 51.8,61.3 51.8,82.4 48.3,85.9 39.7,85.9 35.7,81.9

## Other copper
Bottom Layer:
  text "EE 411-Lab" at 82.25,71.45 h1.5
  text "Solar-Powered USB Charger" at 82.25,69.15 h1.5
  text "By:" at 82.25,65.05 h1.5
  text "Nicolas Alvarez" at 82.25,61.95 h1.5
  text "Corey Zaas" at 82.25,59.55 h1.5
  text "Luke Adame" at 82.25,57.05 h1.5

## Silkscreen, mask and mechanical layers (free items; w line width, h text height)
Top Overlay:
  drawing of 598 lines, arcs and shapes, not listed
  text "-" at 18.154,82.192 h1.52
  text "+" at 38.704,82.125 h1.52
  text "LTC1624 Buck Converter" at 47.3,49.9 h1.7
Bottom Solder:
  text "EE 411-Lab" at 82.3,71.55 h1.5
  text "Solar-Powered USB Charger" at 82.3,69.1 h1.5
  text "By:" at 82.3,65 h1.5
  text "Nicolas Alvarez" at 82.3,61.9 h1.5
  text "Corey Zaas" at 82.3,59.5 h1.5
  text "Luke Adame" at 82.3,57 h1.5
Board Outline:
  lines w0.5: 1,1 1,85 85,85 85,1 1,1